# EAGLE board 4IO (EAGLE 6.5.0)

Size 59.62 x 106.5 mm. Coordinates in mm from the lower left corner, seen from the top.
Copper layers (1*16): Top 0.035mm / dielectric 1.5mm / Bottom 0.035mm
Design rules "default": minimum track width 10mil, minimum drill 24mil, track to track 8mil, track to pad 8mil, pad to pad 8mil, via to via 8mil, smd to smd 8mil, copper to edge 40mil, drill to drill 8mil, minimum pad ring 10mil, minimum via ring 8mil, stop-mask expansion 4mil, vias tented up to drill 0mil, thermal gap 10mil

## Placement (x,y rotation side)
U$1  EURORACK_PCB12HP  [EURORACK12HPPCB]  -0.5,0 0 top
U$2  INOUTBOARD  [INOUTBOARD]  12.2,91.44 0 top
U$3  INOUTBOARD  [INOUTBOARD]  12.2,66.04 0 top
U$4  INOUTBOARD  [INOUTBOARD]  12.2,40.64 0 top
U$5  INOUTBOARD  [INOUTBOARD]  12.2,15.24 0 top

## Library data of the parts
U$1-U$5 = EurorackModularParts